# Altium PCB PCB.PcbDoc
Units mil, origin at the board's own origin, x right, y up, seen from the top; angles counter-clockwise.
Board outline 1360 x 1765 mil, 2 copper layers (Top Layer, Bottom Layer); 16 components, 16 nets, 53 pads, 0 vias.
Unrouted connection lines stored in the file: 1.
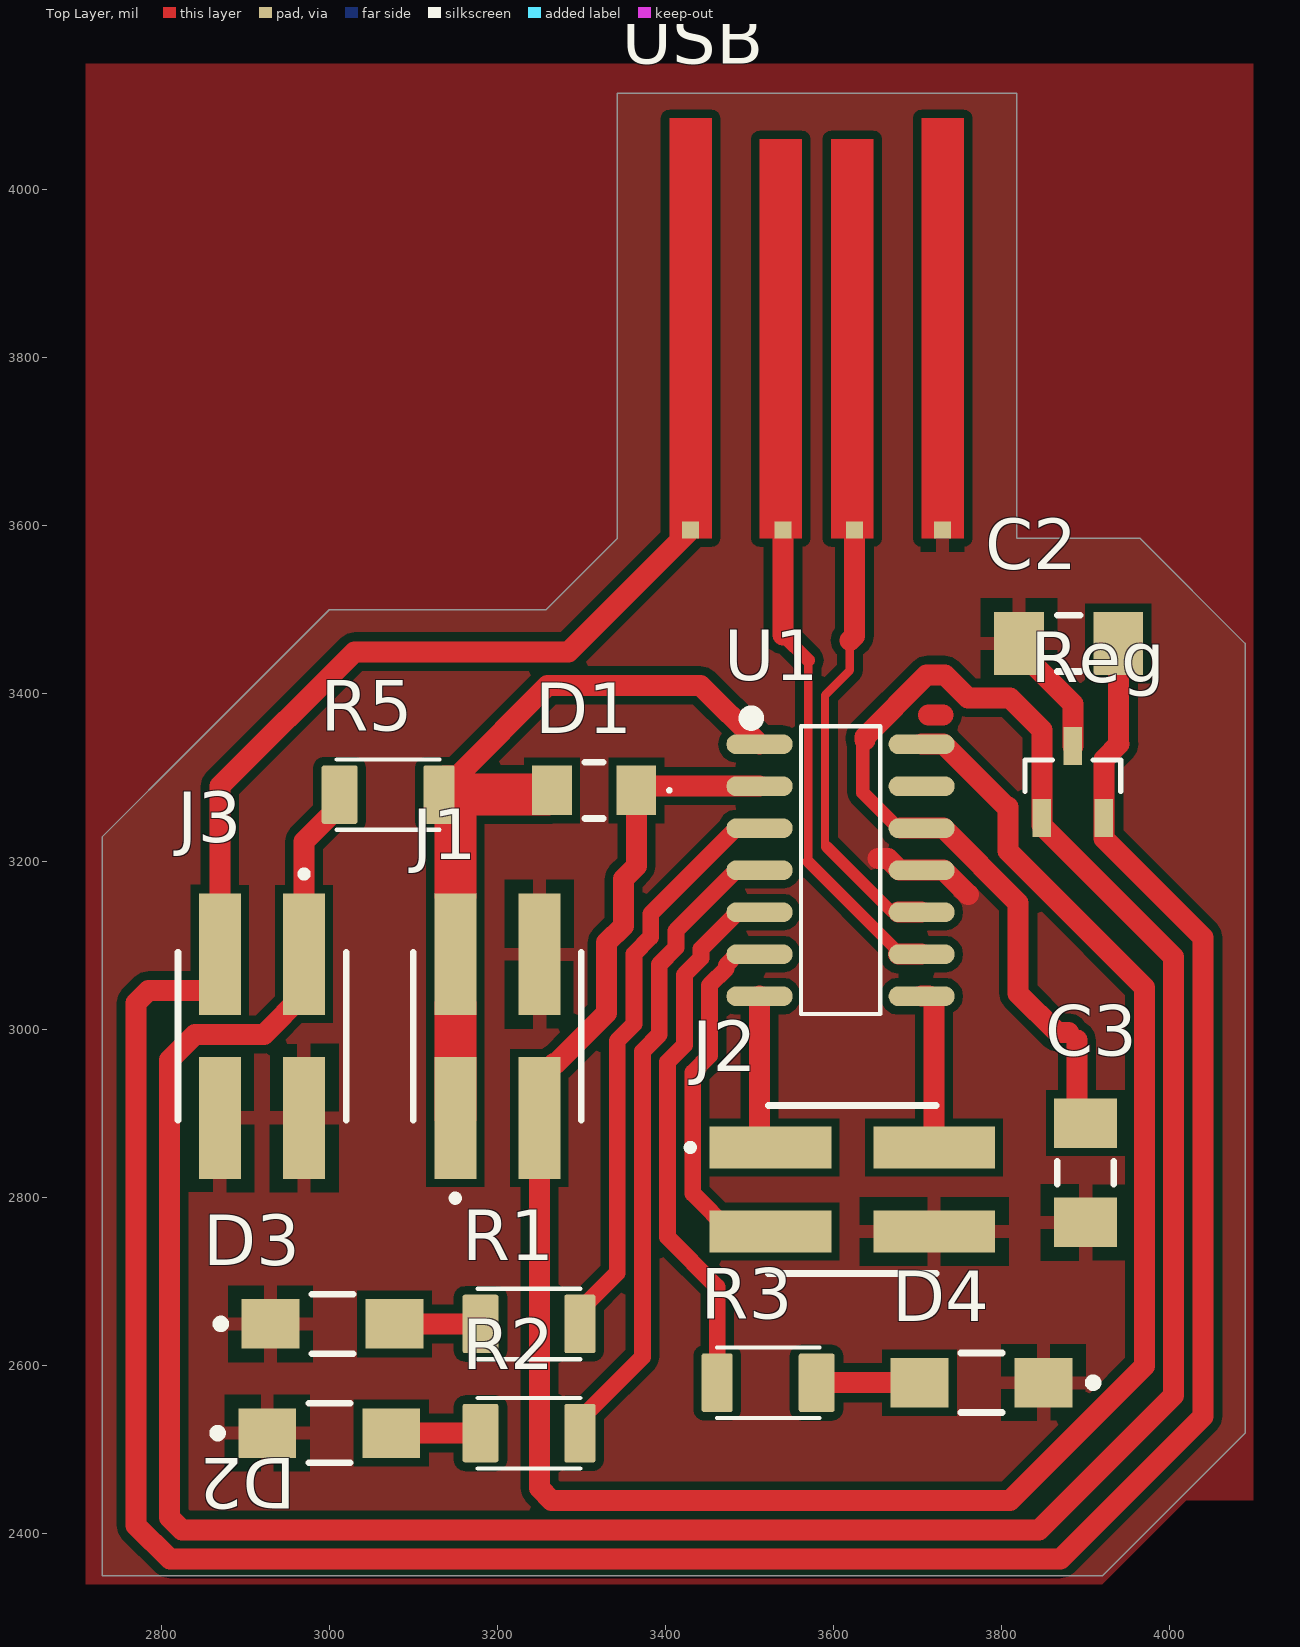
[diagram p0: Top Layer view]
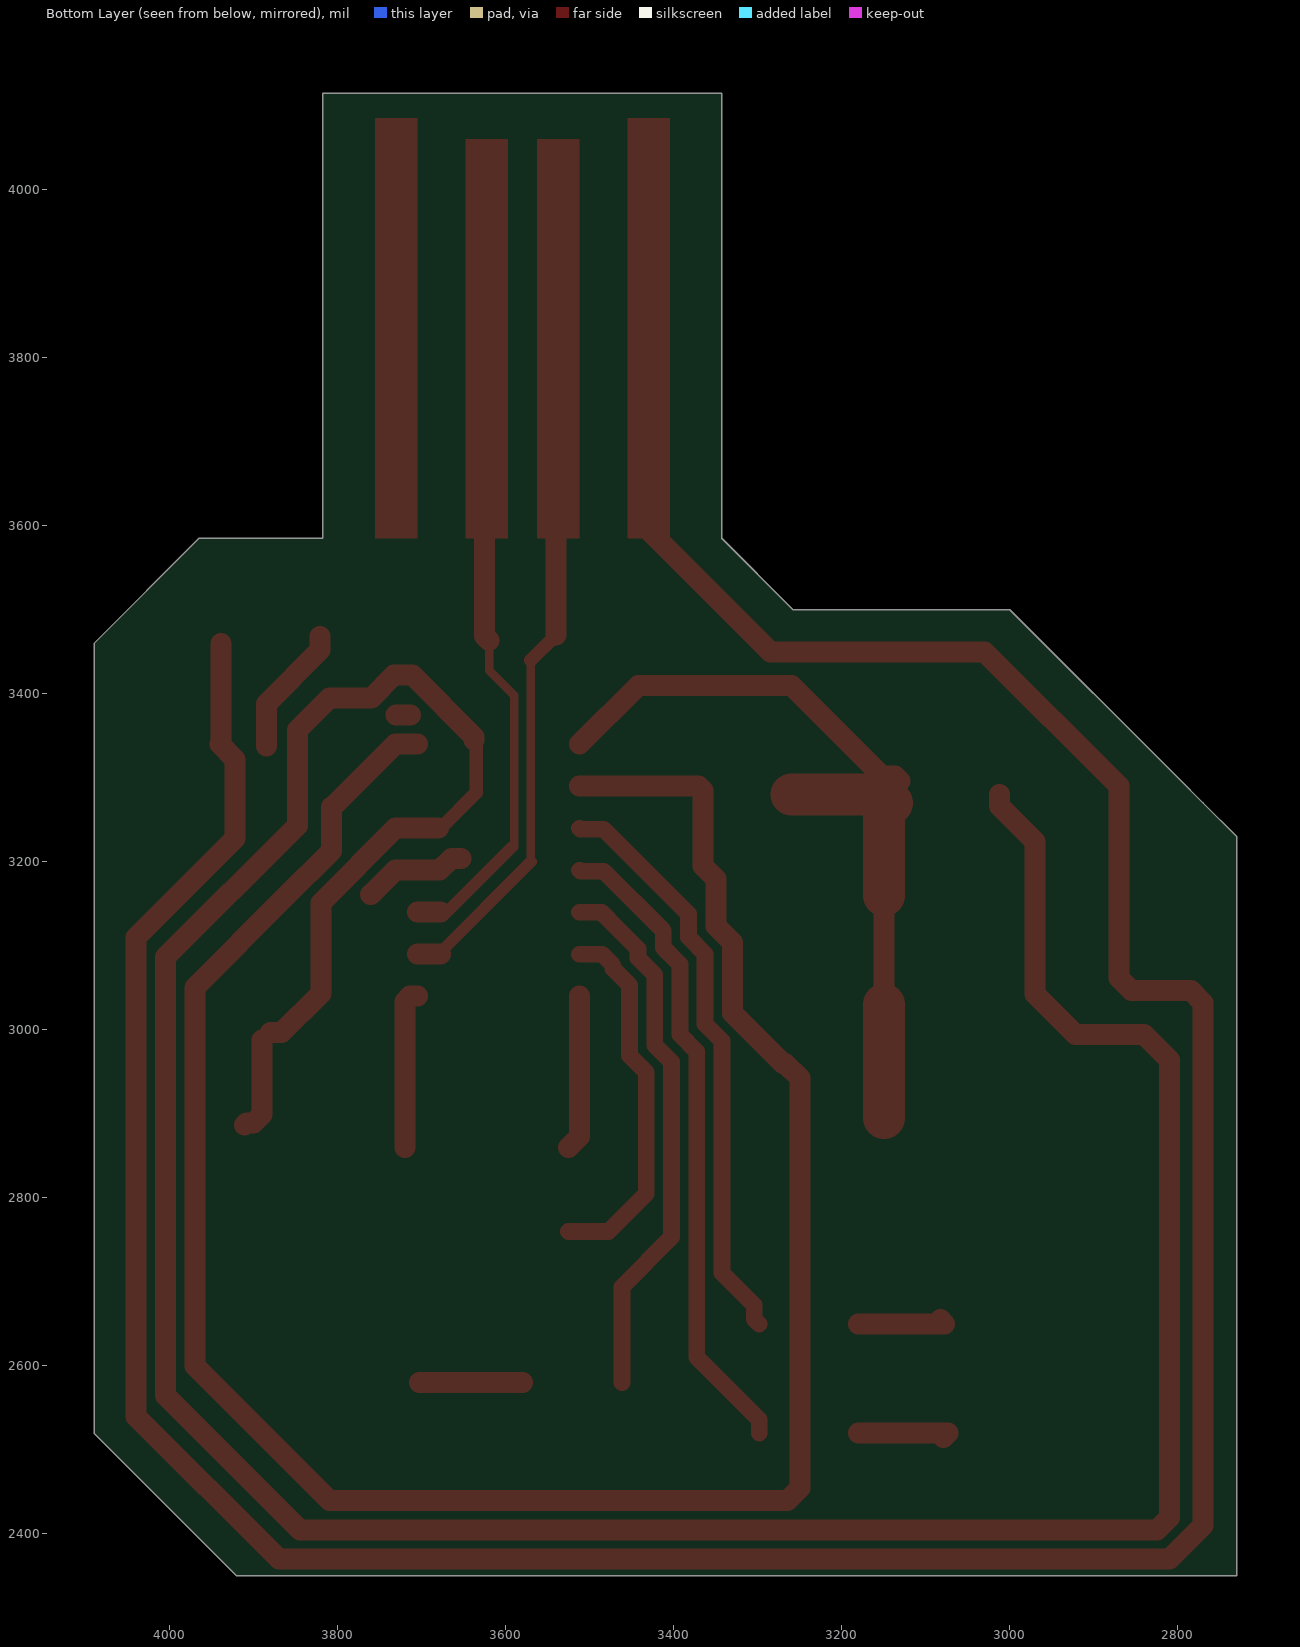
[diagram p1: Bottom Layer view, seen from below]

## Layer stack, top to bottom
Top Solder: solder mask 0.4, Solder Resist, Dk 3.5
Top Layer: signal copper 1.4
Dielectric 1: dielectric 12.6, FR-4, Dk 4.8
Bottom Layer: signal copper 1.4
Bottom Solder: solder mask 0.4, Solder Resist, Dk 3.5

## Board outline
2730,2350 2730,3230 2770,3270 2800,3300 3000,3500 3258,3500 3343,3585 3343,4115 3818,4115 3818,3585 3965,3585 4090,3460 4090,2520 3920,2350

## Design rules (kind name [scope] priority, off if disabled: settings)
Clearance [All] p1: gap=10 ignorepadtopadclearanceinfootprint=FALSE except(0: Arc-Hole Track-Hole SMDPad-Hole THPad-Hole Via-Hole Fill-Hole Poly-Hole Region-Hole Text-Hole)
PlaneConnect [All] p1: planeconnectstyle=Relief reliefexpansion=20 reliefentries=4 reliefconductorwidth=16 reliefairgap=16
PolygonConnect [All] p1: connectstyle=Relief reliefconductorwidth=16 reliefentries=4 polygonreliefangle="90 Angle" airgapwidth=16
RoutingVias [All] p1: holewidth=28 width=50 viastyle="Through Hole" minholewidth=28 minwidth=50 maxholewidth=28 maxwidth=50
SolderMaskExpansion [All] p1: expansion=4 istentingtop=FALSE
Width [All] p1: maxlimit=50 minlimit=10 preferedwidth=20 bottomlayer_maxwidth=10 bottomlayer_prefwidth=10 minimp=50.000000 maximp=50.000000 favimp=50.000000
29 further rules are at their usual default settings.

## Components (designator, comment, footprint, x,y, rotation, side; value= is the part's Value field where it differs from the comment)
C2 "C1206" KEMT-1206-2_M 3880,3460 r0 top
C3 "C1206" KEMT-1206-2_M 3900,2830 r90 top
D1 "CD1206-S01575" BOUR-CD1206-S01575-2_L 3315.2,3285 r0 top
D2 "LED" FP-APTD3216CGCK-MFG 3003.82,2650 r0 top
D3 "LED" FP-APTD3216CGCK-MFG 3000,2520 r0 top
D4 "LED" FP-APTD3216CGCK-MFG 3776.18,2580 r180 top
J1 "0x02" SAMTEC_TSM-102-02-T-DV 3200,2992.56 r180 top
J2 "0x02" SAMTEC_TSM-102-02-T-DV 3622.56,2810 r90 top
J3 "0x02" SAMTEC_TSM-102-02-T-DV 2920,2992.56 r0 top
R1 "200R" RESC3115X65N 3237.68,2650 r0 top
R2 "200R" RESC3115X65N 3237.68,2520 r0 top
R3 "200R" RESC3115X65N 3522.32,2580 r180 top
R5 "4.7k" RESC3115X65N 3070,3280 r0 top
Reg "LM3480IM3-3.3" SOT95P251X112-3N 3885,3295 r0 top
U1 "ATSAMD11C14A-SSUT" SOIC127P600X160-14N 3608.54,3190 r0 top
USB "USBConnRAW" USBConnRAW 3405,3585 r0 top

## Footprints (in the part's own frame and the unit in brackets; to place one, negate y for a bottom-side part, rotate by r counter-clockwise, add the part's x,y. Pads: shape width x height; smd on the part's side, far side on the other; paste and mask are expansions set on the pad)
BOUR-CD1206-S01575-2_L [mm] "Molded Diode, 2-Leads, Body 3.4x1.7mm, IPC High Density"
  rect 1.2x1.5 smd: 1(-1.275,0) 2(1.275,0)
  silkscreen extent -0.28,-0.85 2.32,0.85, body extent -1.7,-0.85 1.7,0.85, height 0.95
FP-APTD3216CGCK-MFG [mm]
  rect 1.75x1.5 smd paste+0 mask+0: 1(-1.875,0) 2(1.875,0)
  silkscreen extent -3.5,-0.9 0.63,0.9, body extent -2.85,-1 2.85,1, height 0.25
KEMT-1206-2_M [mm] "SMD, 2-Leads, Body 3.4x1.8mm, IPC Low Density"
  rect 1.5x1.9 smd: 1(-1.5,0) 2(1.5,0)
  silkscreen extent -0.35,-0.85 0.35,0.85, body extent -1.7,-0.9 1.7,0.9, height 0.88
RESC3115X65N [mm]
  rrect14% 1.09x1.77 smd: 1(-1.465,0)
  rrect14% 0.94x1.77 smd: 2(1.54,0)
  silkscreen extent -1.55,-1.06 1.55,1.06
SAMTEC_TSM-102-02-T-DV [mm]
  rect 1.27x3.68 smd: 01(1.27,2.475) 02(1.27,-2.475) 03(-1.27,2.475) 04(-1.27,-2.475)
  silkscreen extent -2.54,-2.54 2.54,5, body extent -2.54,-3.72 2.54,3.72, height 12.19
SOIC127P600X160-14N [mm]
  oval 2x0.6 smd: 1(-2.45,3.81) 2(-2.45,2.54) 3(-2.45,1.27) 4(-2.45,0) 5(-2.45,-1.27) 6(-2.45,-2.54) 7(-2.45,-3.81) 8(2.45,-3.81) 9(2.45,-2.54) 10(2.45,-1.27) 11(2.45,0) 12(2.45,1.27) 13(2.45,2.54) 14(2.45,3.81)
  silkscreen extent -2.78,-4.35 1.2,4.68
SOT95P251X112-3N [mil]
  rect 22x45 smd: 1(-37,-43) 2(37,-43) 3(0,43)
  silkscreen extent -57,-11 57,26
USBConnRAW [mil]
  rect 20x20 smd paste+0 mask+0: 5V(25,10) DATA+(220,10) DATA-(135,10) GND(325,10)
  Top Layer region: 107.5,0 157.5,0 157.5,475 107.5,475
  Top Layer region: 300,0 350,0 350,500 300,500
  Top Layer region: 0,0 50,0 50,500 0,500
  Top Layer region: 192.5,0 242.5,0 242.5,475 192.5,475

## Part data
C2 C3: library part CMP-1037-04202-2, "CAP, Ceramic, 0.1 uF, +/- 10%, 50 V, -55 to 125 degC, 1206 (3216 Metric), RoHS, Tape and Reel", Capacitance=0.1µF, Capacitance Tolerance=±10%, Capacitor Case Style=1206[3216Metric], Dielectric Characteristic=X7R, Manufacturer=Kemet, Operating Temperature Max=125degC, Operating Temperature Min=-55degC, Package Description="2-Leads SMD, Body 3.2 x 1.6 mm", Package Reference=1206-2, Voltage Rating=50V, Datasheet URL=https://datasheet.ciiva.com/6125/1725438-6125494.pdf, Datasheet Version=Jul-13, Manufacturer URL=http://www.kemet.com/, Packaging=Tape&Reel, Product Range=KEMET-CSeries, SVHC=ToBeAdvised
D1: library part CMP-0583-00001-2, "75 V Small Signal Switching Diode, 150 mA, 2.5 uA, 1026 Molded Package, RoHS, Tape and Reel", Average Forward Current="150 mA", Capacitance Between Terminals (Max.)="3 pF", Forward Voltage (Max.)="1.00 V", Manufacturer=Bourns, Reverse Current (Max.)="2.5 uA", Reverse Voltage="75 V", ComponentLink1Description="Manufacturer URL", ComponentLink1URL=http://www.bourns.com/, ComponentLink2Description=Datasheet, ComponentLink2URL=http://www.bourns.com/data/global/pdfs/CD1206_S01575.pdf, ComponentLink3Description="Package Specification", ComponentLink3URL=http://www.bourns.com/data/global/pdfs/CD1206_S01575.pdf, DatasheetVersion="Rev. 06/11", Mounting Technology="Surface Mount", PackageDescription="2-Pin SMD, Body 3.2 x 1.5 mm", PackageReference=CD1206-S01575-2, Packing="Tape and Reel", PartNumber=CD1206-S01575, Reverse Recovery Time (Max.)="4 nS", RoHS=TRUE
D2 D3 D4: library part CMP-2000-05792-2, "LED GREEN CLEAR 2SMD", Case Code (Imperial)=1206, Case Code (Metric)=3216, Color=Green, Forward Current=20mA, Forward Voltage=2.1V, Lens Color=Clear, Max Operating Temperature=85°C, Min Operating Temperature=-40°C, Package Quantity=2000, Case/Package=1206, Dominant Wavelength=570nm, Height=1.8mm, Illumination Color=Green, Lead Free="Lead Free", Length=3.2mm, Lens Style=Clear, Luminous Intensity=300mcd, Mount="Surface Mount", Number of LEDs=1, Number of Pins=2, Packaging="Tape and Reel", Test Current=20mA, Viewing Angle=50°, Width=1.6mm
J1 J2 J3: library part TSM-102-02-T-DV, "TSM - Samtec 2.54mm Dual Row Vertical Surface Mount Header 8.13mm Post Height (02) - Fast Stock", Package=None, Availability=Warning, Check_prices=https://www.snapeda.com/parts/TSM-102-02-T-DV/Samtec%20Inc./view-part/3473333/?ref=eda, MF="Samtec Inc.", MP=TSM-102-02-T-DV, Price=None, Purchase-URL=https://pricing.snapeda.com/search/part/TSM-102-02-T-DV/?ref=eda, SnapEDA_Link=https://www.snapeda.com/parts/TSM-102-02-T-DV/Samtec%20Inc./view-part/3473333/?ref=snap
R1 R2 R3 R5: library part 4-2176245-2, "CRGS1206 5% 2K7", Package=None, Availability=Unavailable, MP=4-2176245-2, Price=None
Reg: "100-mA, 30-V, low-dropout voltage regulator 3-SOT-23 -40 to 125", Package="SOT-23 Texas", Availability=Good, Check_prices=https://www.snapeda.com/parts/LM3480IM3-3.3/NOPB/Texas%20Instruments/view-part/15344/?ref=eda, MF=Texas, MP=LM3480IM3-3.3/NOPB, Price=None, Purchase-URL=https://pricing.snapeda.com/search/part/LM3480IM3-3.3/NOPB/?ref=eda, SnapEDA_Link=https://www.snapeda.com/parts/LM3480IM3-3.3/NOPB/Texas%20Instruments/view-part/15344/?ref=snap
U1: "MCU 32-Bit SAM D11 ARM Cortex M0+ RISC 16KB Flash 1.8V/2.5V/3.3V 14-Pin SOIC T/R", Package=None, Availability=Unavailable, MP=ATSAMD11C14A-SSUT, Price=None
USB: "USB Connector directly on the PCB, without connector"

## Nets (pads, with @x,y where several pads share a name; then routed paths per layer and width w, separated by ;. In a path a pad name is that pad's centre, name@x,y a point inside that pad or via, vN(x,y) a via of type N, cw(c..) or ccw(c..) an arc to the next point about the centre after c; other vN are vias at no path point)
+3.3: C3.2 J3.01 R5.1 Reg.1 U1.12 | length 3994.1
  Top Layer w16: 3637.5,3345 3635,3342.5 3635,3282.44 3678.6,3238.84 3678.6,3238.66 U1.12@3679.93,3240
  Top Layer w25: R5.1 3012.32,3266.61 2970,3224.29 J3.01 2970,3042.56 2922.14,2994.7 2840.32,2994.7 2810,2964.38 2810,2419.64 2824.64,2405 3845,2405 4005,2565 4005,3086.5 3848,3243.5 Reg.1 3848,3357 3810,3395 3760,3395 3732.86,3422.14 3711.06,3422.14 3637.5,3348.58 3637.5,3345 ; U1.12@3679.93,3240 U1.12 3731.18,3240 3820,3151.18 3820,3043.31 3866.61,2996.69 3880,2996.69 ; 3890,2987.74 3890,2899.06 C3.2 3908.54,2889.06 C3.2@3910.96,2886.63
+5: C2.2 J3.03 Reg.2 USB.5V | length 3982.6
  Top Layer w25: USB.5V 3285,3450 3030,3450 2870,3290 2870,3061.72 2855,3046.72 2784.64,3046.72 2770,3032.07 2770,2410.15 2810.15,2370 3870,2370 4040,2540 4040,3110 3922,3228 Reg.2 3922,3322 3940,3340 3939.06,3340.94 C2.2
GND: C2.1 C3.1 D2.1 D3.1 D4.1 J1.04 J2.04 J3.02 J3.04 Reg.3 U1.11 USB.GND | length 282
  Top Layer w25: 3653.15,3204.03 3664.79,3204.03 3678.82,3190 U1.11 3731.18,3190 3760.34,3160.84 3760.84,3160.84 ; C2.1@3820.94,3467.87 C2.1 3820.94,3452.13 3885,3388.07 Reg.3
NetD1_1: D1.1 J1.01 J1.02 R5.2 U1.1 | length 955.3
  Top Layer w10: D1.1@3260,3280 D1.1 D1.1@3266.19,3283.81
  Top Layer w25: R5.2@3130.63,3296.34 3136.63,3302.34 3152.34,3302.34 3260,3410 3442.09,3410 U1.1 ; J1.02@3150,3030 J1.02 J1.02@3150,3160
  Top Layer w50: R5.2@3140,3270 3150,3260 J1.02@3150,3160 ; J1.01 J1.02@3150,3030 ; 3150,3280 D1.1@3260,3280
NetD1_2: D1.2 J1.03 U1.14 | length 2686.7
  Top Layer w25: 3512.09,3290 3370.39,3290 D1.2 3365.39,3194.89 3350,3179.5 3350,3123.7 3330.22,3103.92 3330.22,3020.22 3270,2960 3267.44,2960 3250,2942.56 J1.03 3250,2454.64 3264.64,2440 3810,2440 3970,2600 3970,3050.68 3863.66,3157.02 3807.58,3213.1 3807.58,3264.98 3806.2,3264.98 3731.18,3340 U1.14
NetD2_2: D2.2 R1.1 | length 109.4
  Top Layer w25: D2.2@3082.64,2655 D2.2 R1.1
NetD3_2: D3.2 R2.1 | length 113.3
  Top Layer w25: D3.2@3078.82,2515 D3.2 R2.1
NetD4_2: D4.2 R3.1 | length 122.4
  Top Layer w25: R3.1 D4.2
NetJ2_01: J2.01 U1.7 | length 185.4
  Top Layer w25: U1.7 3512.09,2873.03 J2.01
NetJ2_02: J2.02 U1.8 | length 191.3
  Top Layer w25: U1.8 3713.71,3040 3720,3033.71 J2.02
NetJ2_03: J2.03 U1.6 | length 444.5
  Top Layer w20: U1.6 3485.51,3090 3472.5,3076.99 3472.5,3072.96 3452.72,3053.18 3452.72,2969.48 3432.68,2949.44 3432.68,2805 3477.68,2760 J2.03
NetR1_2: R1.2 U1.3 | length 694.7
  Top Layer w20: R1.2 3304.31,2656 3304.31,2672.34 3342.68,2710.71 3342.68,2986.72 3362.72,3006.75 3362.72,3090.46 3382.5,3110.24 3382.5,3137.97 3483.34,3238.82 3510.9,3238.82 U1.3
NetR2_2: R2.2 U1.4 | length 774.7
  Top Layer w20: R2.2 3298.31,2536.34 3372.68,2610.71 3372.68,2974.29 3392.72,2994.33 3392.72,3078.03 3412.5,3097.81 3412.5,3117.97 3483.34,3188.82 3510.9,3188.82 U1.4
NetR3_2: R3.2 U1.5 | length 645.1
  Top Layer w20: R3.2 3461.69,2694.16 3402.68,2753.18 3402.68,2961.86 3422.72,2981.9 3422.72,3065.6 3442.5,3085.39 3442.5,3096.5 3469.82,3123.82 3484.53,3138.52 3484.53,3138.62 3485.91,3140 U1.5
NetU1_9: U1.9 USB.DATA- | length 590.5
  Top Layer w10: 3570,3200 3570,3440
  Top Layer w14: 3570,3200 U1.9@3680,3090
  Top Layer w16: 3540,3470 3570,3440
  Top Layer w25: 3540,3470 USB.DATA- ; U1.9@3677.44,3090 U1.9
NetU1_10: U1.10 USB.DATA+ | length 529.4
  Top Layer w10: 3590,3218 3590,3398.28 3619.7,3427.98 3619.7,3463.59
  Top Layer w14: 3592,3218 U1.10@3670,3140
  Top Layer w25: 3619.7,3463.59 3625,3468.89 USB.DATA+ ; U1.10@3677.44,3140 U1.10
pads on no net: U1.2 U1.13
copper on no net: | length 17.1
  Top Layer w25: 3713.42,3375 3730.5,3375

## Polygon pours and split planes (outlines as drawn)
GND on Top Layer "GND" (solid, pour order 0): 2710,4150 4100,4150 4100,2440 4020,2440 3920,2340 2710,2340

## Silkscreen, mask and mechanical layers (free items; w line width, h text height)
Mechanical 1:
  lines w10: 3343,3585 3258,3500 3000,3500 2800,3300 2770,3270 2730,3230 2730,2350 3920,2350 4090,2520 4090,3460 3965,3585 3818,3585